# EAGLE board F21_CurrPDM v54 (EAGLE 9.7.0)
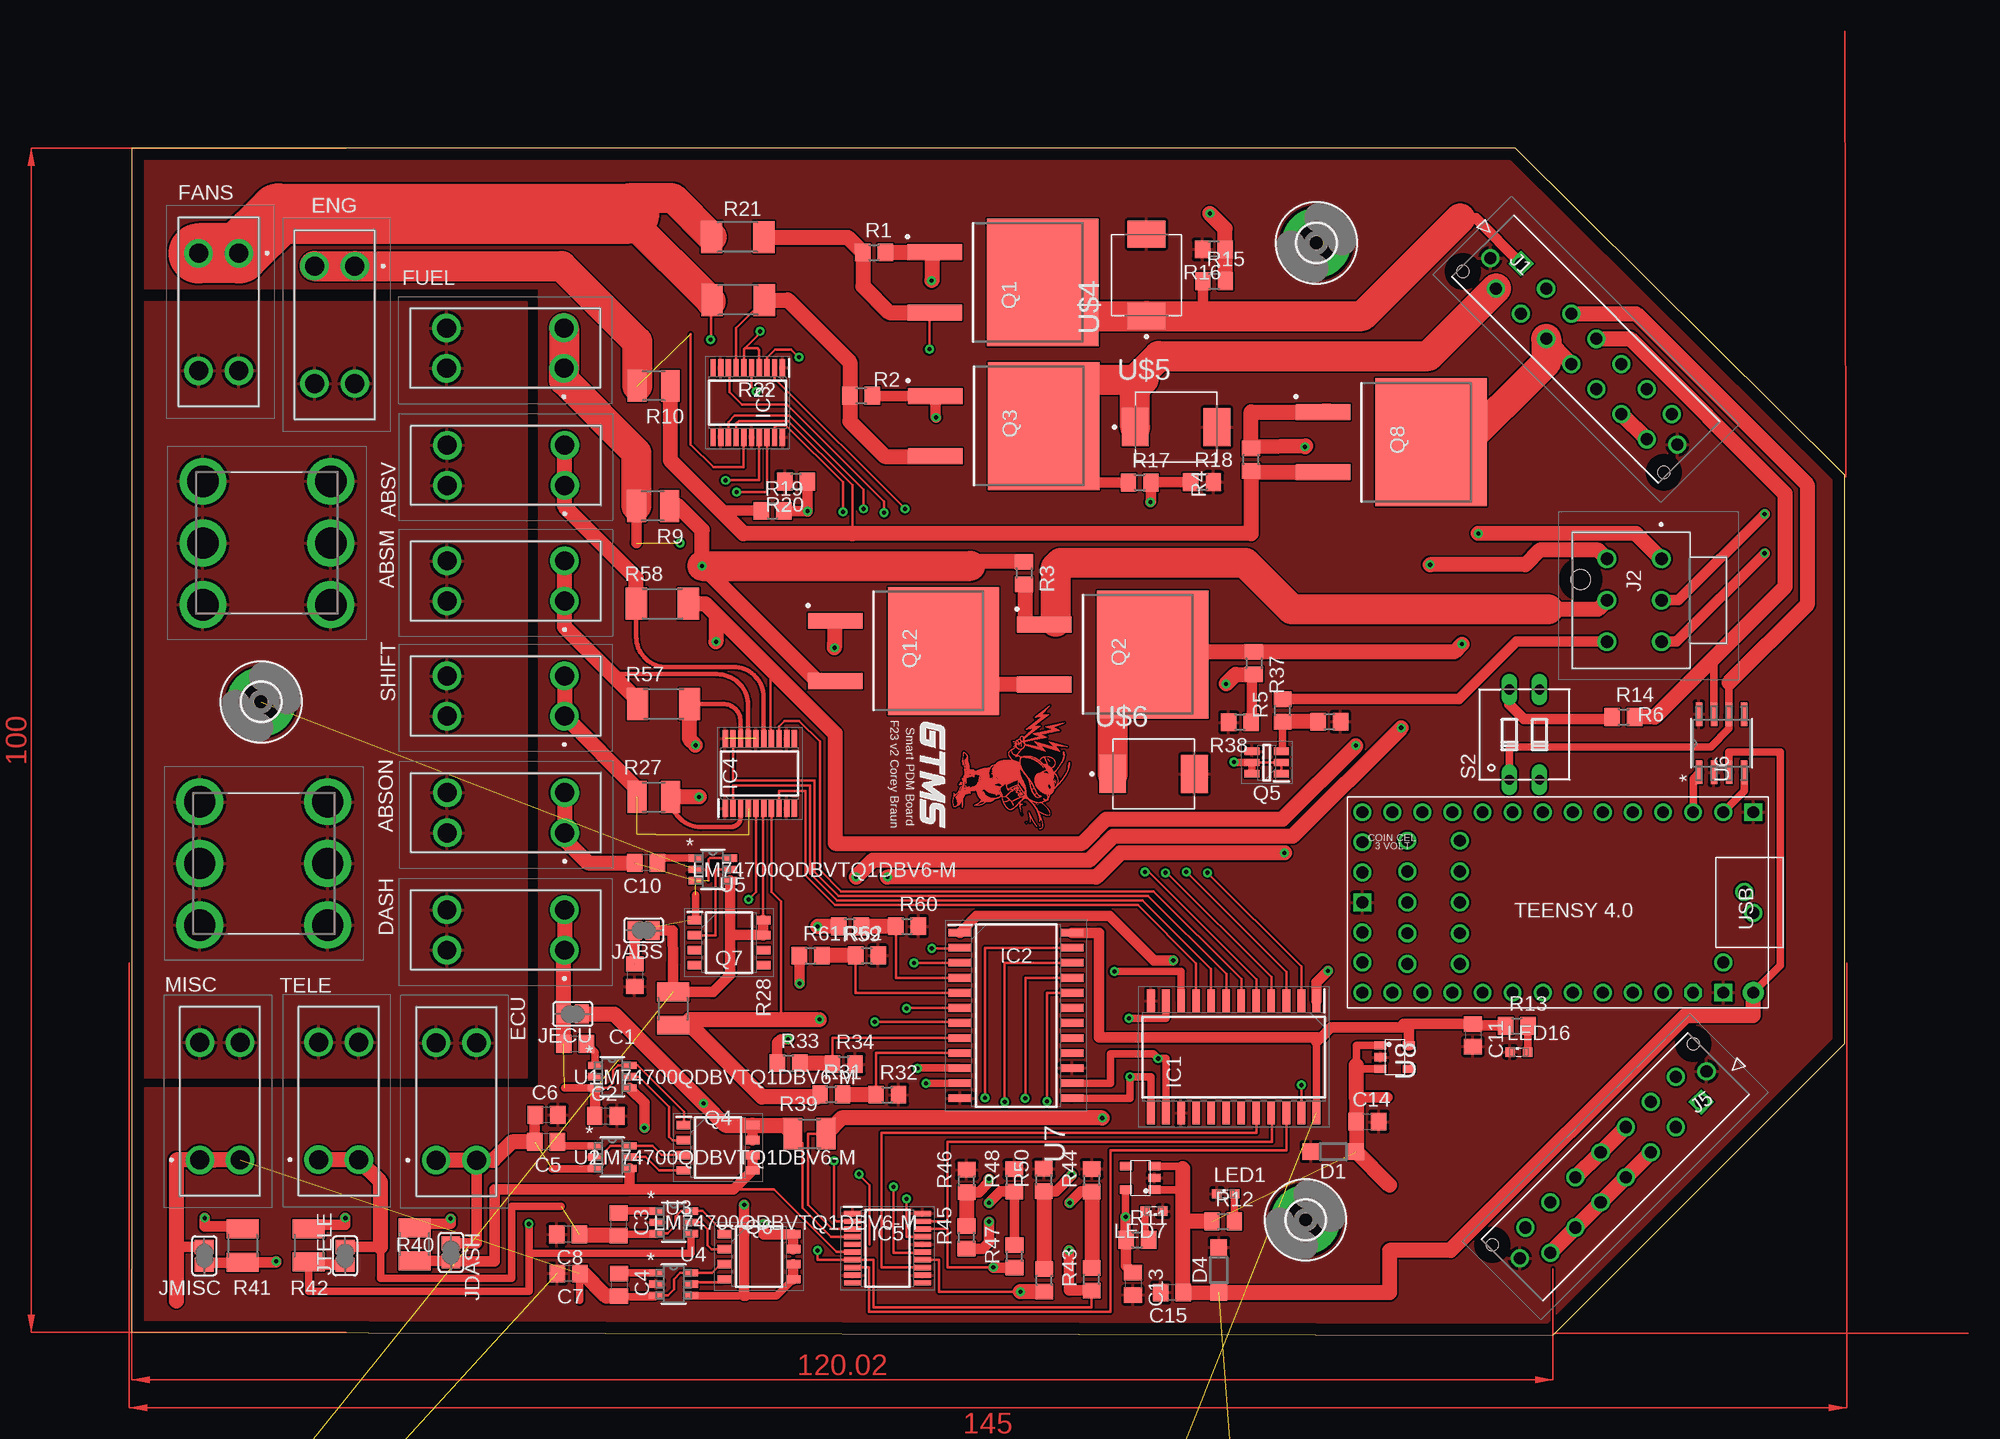
[diagram p0: board, top side]
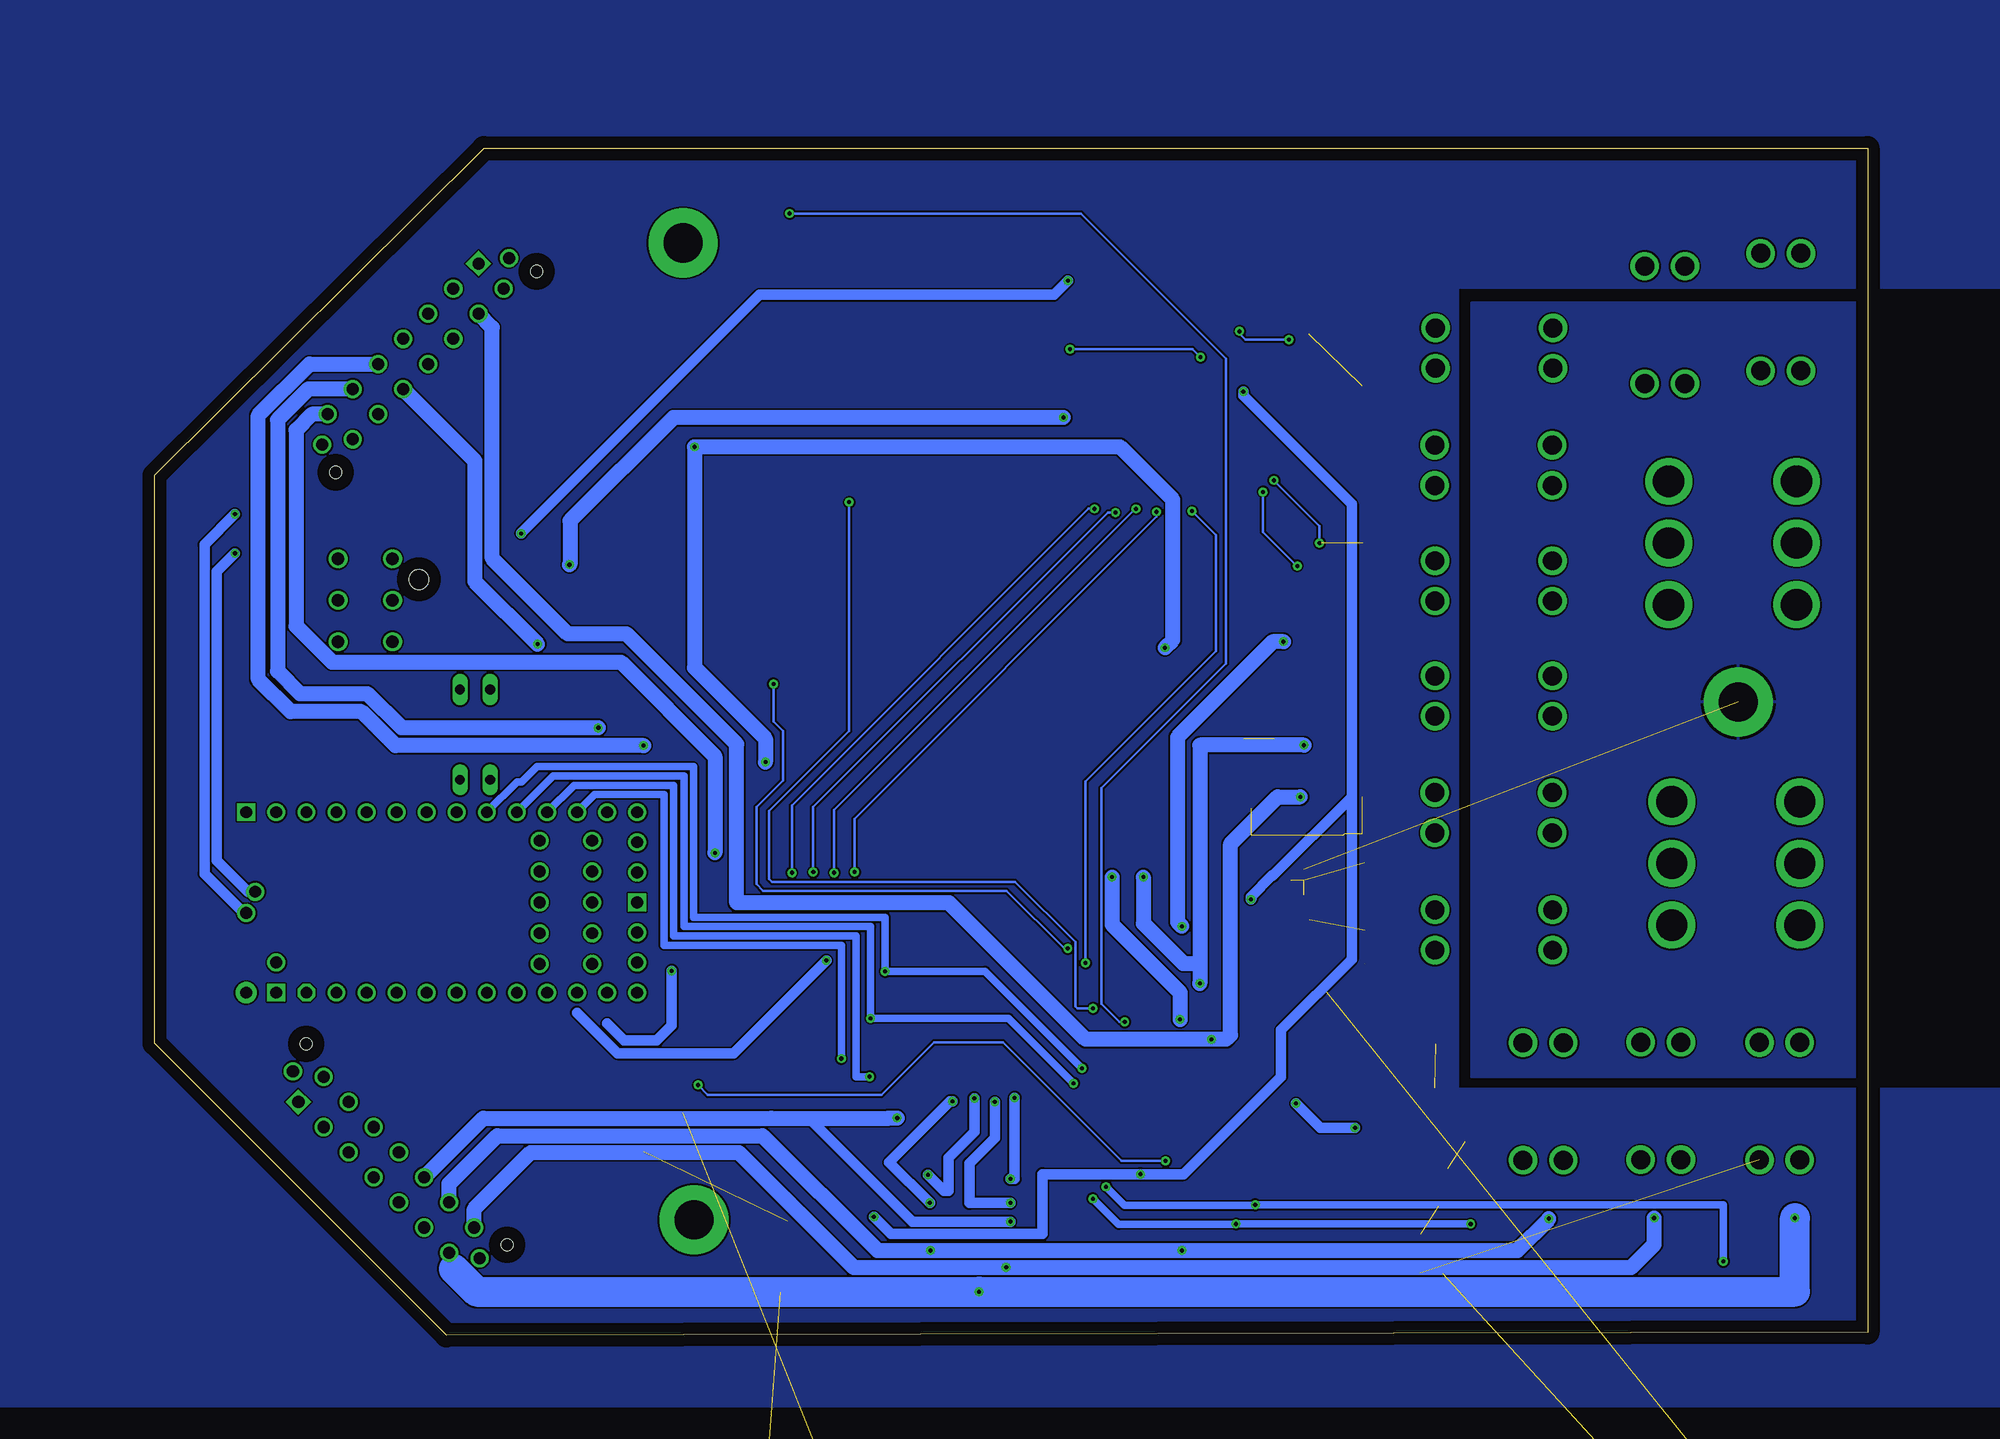
[diagram p1: board, bottom side, seen from below]

Size 144.65 x 100.25 mm. Coordinates in mm from the lower left corner, seen from the top.
Outline: 0,0.25 120.02,0 144.65,24.64 144.65,72.64 116.84,100.25 0,100.25 0,0.25
Copper layers (1*16): Top 0.035mm / dielectric 1.5mm / Bottom 0.035mm
Design rules "default *": minimum track width 6mil, minimum drill 0.35mm, track to track 6mil, track to pad 6mil, pad to pad 6mil, via to via 6mil, smd to smd 6mil, copper to edge 40mil, drill to drill 6mil, minimum pad ring 10mil, minimum via ring 8mil, stop-mask expansion 4mil, vias tented up to drill 0mil, thermal gap 10mil

## Footprints (pad centres in the part's own frame; a part is rotated, then mirrored left to right if it is on the bottom)
3568 = drill 1.6 pad 2.4: 1 0,0; 2 0,-3.4; 3 9.92,0; 4 9.92,-3.4
C0805 = smd 1.3 x 1.5: 1 -0.95,0; 2 0.95,0
CAPMP7343X310N = smd 2.368 x 2.404: 1 -3.121,0; 2 3.121,0
SOD123 = smd 1.4 x 1.4: A 1.9,0; C -1.9,0
DIOM5436X247N = smd 2.25 x 2.12: A 2.185,0; C -2.185,0
3,3-PAD = drill 3.3 pad 5.842: B3,3 0,0
SOIC127P1030X265-24N = smd 1.95 x 0.65: 1 -4.725,6.985; 2 -4.725,5.715; 3 -4.725,4.445; 4 -4.725,3.175; 5 -4.725,1.905; 6 -4.725,0.635; 7 -4.725,-0.635; 8 -4.725,-1.905; 9 -4.725,-3.175; 10 -4.725,-4.445; 11 -4.725,-5.715; 12 -4.725,-6.985; 13 4.725,-6.985; 14 4.725,-5.715; 15 4.725,-4.445; 16 4.725,-3.175; 17 4.725,-1.905; 18 4.725,-0.635; 19 4.725,0.635; 20 4.725,1.905; 21 4.725,3.175; 22 4.725,4.445; 23 4.725,5.715; 24 4.725,6.985
SOP65P640X120-20N = smd 1.475 x 0.45: 1 -2.938,2.925; 2 -2.938,2.275; 3 -2.938,1.625; 4 -2.938,0.975; 5 -2.938,0.325; 6 -2.938,-0.325; 7 -2.938,-0.975; 8 -2.938,-1.625; 9 -2.938,-2.275; 10 -2.938,-2.925; 11 2.938,-2.925; 12 2.938,-2.275; 13 2.938,-1.625; 14 2.938,-0.975; 15 2.938,-0.325; 16 2.938,0.325; 17 2.938,0.975; 18 2.938,1.625; 19 2.938,2.275; 20 2.938,2.925
43045-14YY_24,25,26 = drill 1.02 pad 1.37 square: 1 0,0 | drill 1.02 pad 1.37: 2 -3,0; 3 -6,0; 4 -9,0; 5 -12,0; 6 -15,0; 7 -18,0; 8 0,3; 9 -3,3; 10 -6,3; 11 -9,3; 12 -12,3; 13 -15,3; 14 -18,3 | drill 1.016 pad 1.37: 15 2.15,1.5; 16 -20.15,1.5 | hole 1.02: 3,3.94; -21,3.94
1722981106 = drill 1.06 pad 1.59: 1 -3.125,1.085; 2 0.375,1.085; 3 3.875,1.085; 4 -3.125,-3.515; 5 0.375,-3.515; 6 3.875,-3.515 | hole 1.64: -1.375,-5.745
8196 = drill 2.64 pad 3.96: 1 0,0; 2 0,10.8; 3 5.21,0; 4 5.21,10.8; 5 10.42,0; 6 10.42,10.8
8195 = drill 1.7 pad 2.55: 1 0,0; 2 0,-7.01; 3 4.75,-7.01; 4 4.75,0
SJ = smd 1.168 x 1.6: 1 -0.762,0; 2 0.762,0
IND_BOURNS_RLB0914 = drill 0.914 pad 1.422 square: 1 -5.791,0 | drill 0.914 pad 1.422: 2 0,0
SML0603 = smd 0.8 x 0.8: A 0.75,0; C -0.75,0
PG-TO263-3-2_1 = smd 1.35 x 4.6: 1 -2.54,-12.5; 2 2.54,-12.5 | smd 10.8 x 9.4: 3 0,-3.35
SOIC127P605X105-8N = smd 1.212 x 0.7: 1 -2.894,1.905; 2 -2.894,0.635; 3 -2.894,-0.635; 4 -2.894,-1.905; 5 2.894,-1.905; 6 2.894,-0.635; 7 2.894,0.635; 8 2.894,1.905
SOT95P275X110-6N = smd 1.25 x 0.6: 1 -1.25,0.95; 2 -1.25,0; 3 -1.25,-0.95; 4 1.25,-0.95; 5 1.25,0; 6 1.25,0.95
R0805 = smd 1.3 x 1.5: 1 -0.95,0; 2 0.95,0
R1210 = smd 1.6 x 2.7: 1 -1.4,0; 2 1.4,0
R2010 = smd 1.8 x 2.7: 1 -2.2,0; 2 2.2,0
DIP02YL = drill 0.813 long: 1 -1.27,-3.81; 2 1.27,-3.81; 3 1.27,3.81; 4 -1.27,3.81
DBV6-M = smd 1.181 x 0.61: 1 -1.467,0.95; 2 -1.467,0; 3 -1.467,-0.95; 4 1.467,-0.95; 5 1.467,0; 6 1.467,0.95
SOIC8 = smd 1.981 x 0.559: 1 -2.464,1.905; 2 -2.464,0.635; 3 -2.464,-0.635; 4 -2.464,-1.905; 5 2.464,-1.905; 6 2.464,-0.635; 7 2.464,0.635; 8 2.464,1.905
TSOP-5 = smd 0.7 x 1: 1 -0.99,-1.2; 2 0,-1.2; 3 0.99,-1.2; 4 0.99,1.2; 5 -0.99,1.2
SOT23-6 = smd 1.06 x 0.65: 1 -1.1,0.95; 2 -1.1,0; 3 -1.1,-0.95; 4 1.1,-0.95; 5 1.1,0; 6 1.1,0.95
TEENSY40 = drill 1: 0-RX1 -13.97,-7.62; 1-TX1 -11.43,-7.62; 2-OUT2 -8.89,-7.62; 3-LRCLK2 -6.35,-7.62; 3V3-2 16.51,-2.54; 4-BCLK2 -3.81,-7.62; 5-IN2 -1.27,-7.62; 6-OUT1D 1.27,-7.62; 7-RX2/OUT1A 3.81,-7.62; 8-TX2/IN1 6.35,-7.62; 9-OUT1C 8.89,-7.62; 10-CS/MQSR 11.43,-7.62; 11-MOSI/CTX1 13.97,-7.62; 12-MIO/MQSL 16.51,-7.62; 13-SCK/CRX1/LED 16.51,7.62; 14-A0/TX3/S-PFI_OUT 13.97,7.62; 15-A1/RX3/S-PDIF_IN 11.43,7.62; 16-A2/RX4/SCL1 8.89,7.62; 17-A3/TX4/SDA1 6.35,7.62; 18-A4/SDA0 3.81,7.62; 19-A5/SCL0 1.27,7.62; 20-A6/TX5/LRCLK1 -1.27,7.62; 21-A7/RX5/BCLK1 -3.81,7.62; 22-A8/CTX1 -6.35,7.62; 23-A9/CRX1/CCLK1 -8.89,7.62; 24-A10/TX6/SCL2 12.7,5.207; 25-A11/SDA2 8.255,5.207; 26-A12/MOSI1 12.7,2.603; 27-A13/SCK1 8.255,2.603; 28-RX7 12.7,0; 29-TX7 8.255,0; 30-CRX3 12.7,-2.603; 31-CTX3 8.255,-2.603; 32-OUTB1 12.7,-5.207; 33-MCLK2 8.255,-5.207; D+ -15.75,-0.9; D- -16.51,0.9; ON/OFF 16.51,5.08; PROGRAM 16.51,2.54; VBAT 16.51,-5.08; VUSB -13.97,5.08 | drill 1 octagon: 3V3-1 -11.43,7.62 | drill 1 square: GND1 -16.51,-7.62; GND2 16.51,0; GND3 -13.97,7.62 | drill 1 pad 1.778: VIN -16.51,7.62
DIOM7959X265N = smd 2.25 x 3.18: A 3.455,0; C -3.455,0

## Placement (x,y rotation side)
ABSM  3568  [3568]  36.54,62.01 180 top
ABSON  3568  [3568]  36.56,42.43 180 top
ABSV  3568  [3568]  36.55,71.78 180 top
C1  1u  [C0805]  37.43,24.6 180 top
C2  10u 25V  [C0805]  40.02,18.54 0 top
C3  1u  [C0805]  41.09,9.38 270 top
C4  1u  [C0805]  41.15,4.26 270 top
C5  1u  [C0805]  34.98,16.34 180 top
C6  10u 25V  [C0805]  35.04,18.63 0 top
C7  10u 25V  [C0805]  36.88,5.22 180 top
C8  10u 25V  [C0805]  36.83,8.53 180 top
C9  .1uF 12V  [C0805]  42.47,30.41 270 top
C10  1u  [C0805]  43.43,39.9 180 top
C11  [C0805]  113.25,25.34 270 top
C13  [C0805]  84.54,4.35 270 top
C14  [C0805]  104.34,18.04 0 top
C15  [C0805]  87.83,3.61 180 top
C18  [CAPMP7343X310N]  84.28,-28.6 0 top  (outside the outline)
C19  .1uF  [C0805]  -27.69,-63.35 0 top  (outside the outline)
C20  [C0805]  -22.56,-88.14 0 top  (outside the outline)
C21  [C0805]  -18.03,-88.14 0 top  (outside the outline)
C22  [C0805]  -27.69,-92.25 0 top  (outside the outline)
D1  [SOD123]  101.45,15.51 180 top
D3  MURS110T3G  [DIOM5436X247N]  -25.3,-80.72 0 top  (outside the outline)
D4  [SOD123]  91.78,5.52 90 top
DASH  3568  [3568]  25.7,14.78 90 top
ECU  3568  [3568]  36.53,32.53 180 top
ENG  3568  [3568]  18.83,90.29 270 top
FANS  3568  [3568]  9.03,91.38 270 top
FUEL  3568  [3568]  36.49,81.66 180 top
H1  MOUNT-PAD-ROUND3.3  [3,3-PAD]  100.03,92.25 0 top
H2  MOUNT-PAD-ROUND3.3  [3,3-PAD]  99.11,9.75 0 top
H3  MOUNT-PAD-ROUND3.3  [3,3-PAD]  10.92,53.49 0 top
IC1  CD74HC4067M96  [SOIC127P1030X265-24N]  93.05,23.51 270 top
IC2  CD74HC4067M96  [SOIC127P1030X265-24N]  74.67,27.01 0 top
IC3  INA4181A2IPWR  [SOP65P640X120-20N]  52,78.78 270 top
IC4  INA4181A2IPWR  [SOP65P640X120-20N]  53.03,47.44 90 top
IC5  INA4181A2IPWR  [SOP65P640X120-20N]  63.81,7.36 0 top
J1  43045-1424  [43045-14YY_24,25,26]  117.31,90.52 135 top
J2  1722981106  [1722981106]  128.07,62.45 270 top
J3  8196  [8196]  16.54,34.64 90 top
J4  8196  [8196]  16.81,61.7 90 top
J5  43045-1424  [43045-14YY_24,25,26]  132.51,19.71 45 top
J6  [8195]  94.03,-26.42 0 top  (outside the outline)
JABS  [SJ]  43.22,34.2 180 top
JDASH  [SJ]  26.94,7 270 top
JECU  [SJ]  37.23,27.13 180 top
JMISC  [SJ]  6.12,6.72 270 top
JTELE  [SJ]  18.01,6.71 90 top
L1  RLB0914-4R7ML  [IND_BOURNS_RLB0914]  -20.52,-71.37 0 top  (outside the outline)
LED1  [SML0603]  92.36,11.95 0 top
LED7  [SML0603]  86.32,10.48 180 top
LED16  [SML0603]  117.12,23.93 0 top
MISC  3568  [3568]  5.75,14.81 90 top
Q1  IPB120P04P4L03ATMA1  [PG-TO263-3-2_1]  80.28,88.92 270 top
Q2  IPB120P04P4L03ATMA1  [PG-TO263-3-2_1]  89.55,57.51 270 top
Q3  IPB120P04P4L03ATMA1  [PG-TO263-3-2_1]  80.35,76.79 270 top
Q4  BUK9K29-100E  [SOIC127P605X105-8N]  49.51,15.85 0 top
Q5  NSVT489AMT1G  [SOT95P275X110-6N]  95.83,48.37 180 top
Q6  BUK9K29-100E  [SOIC127P605X105-8N]  52.96,6.64 0 top
Q7  BUK9K29-100E  [SOIC127P605X105-8N]  50.43,33.15 0 top
Q8  IPB120P04P4L03ATMA1  [PG-TO263-3-2_1]  113.08,75.43 270 top
Q12  IPB120P04P4L03ATMA1  [PG-TO263-3-2_1]  71.89,57.8 270 top
R1  1k  [R0805]  62.68,91.44 0 top
R2  1k  [R0805]  61.59,79.35 0 top
R3  1k  [R0805]  75.34,64.38 270 top
R4  1k  [R0805]  94.51,73.95 90 top
R5  20k  [R0805]  97.18,52.77 90 top
R6  1k  [R0805]  101.11,51.82 0 top
R9  0.02  [R1210]  44.02,70.04 180 top
R10  0.02  [R1210]  44.07,80.18 180 top
R11  330  [R0805]  84.9,8.07 0 top
R12  330  [R0805]  92.15,9.62 0 top
R13  330  [R0805]  116.95,26.14 0 top
R14  [R0805]  125.96,52.22 0 top
R15  36k  [R0805]  91.4,89.02 0 top
R16  10k  [R0805]  91.36,91.71 180 top
R17  36k  [R0805]  85.11,72.02 0 top
R18  10k  [R0805]  90.38,72.06 0 top
R19  36k  [R0805]  54.09,69.63 0 top
R20  10k  [R0805]  56.09,72.09 180 top
R21  0.005  [R2010]  51.16,92.75 180 top
R22  0.005  [R2010]  51.2,87.43 180 top
R23  [R0805]  -14.88,-79.45 0 top  (outside the outline)
R24  [R0805]  -27.69,-88.14 0 top  (outside the outline)
R27  0.02  [R1210]  44.08,45.45 0 top
R28  0.02  [R1210]  45.69,27.59 270 top
R31  36k  [R0805]  59.07,20.35 0 top
R32  10k  [R0805]  63.8,20.32 0 top
R33  36k  [R0805]  55.45,22.99 0 top
R34  10k  [R0805]  60.12,22.9 0 top
R37  36k  [R0805]  94.75,56.76 270 top
R38  10k  [R0805]  93.57,51.77 180 top
R39  0.02  [R1210]  57.22,17.04 0 top
R40  0.02  [R1210]  23.87,7.68 90 top
R41  0.02  [R1210]  9.36,7.58 270 top
R42  0.02  [R1210]  14.95,7.59 270 top
R43  36k  [R0805]  81.05,4.73 90 top
R44  10k  [R0805]  81.06,13.09 90 top
R45  36k  [R0805]  70.49,8.27 90 top
R46  10k  [R0805]  70.49,13.04 90 top
R47  36k  [R0805]  74.54,6.66 90 top
R48  10k  [R0805]  74.52,13.09 90 top
R49  36k  [R0805]  77.04,4.65 90 top
R50  10k  [R0805]  77.01,13.13 90 top
R57  0.005  [R2010]  44.9,53.32 0 top
R58  0.005  [R2010]  44.8,61.8 0 top
R59  36k  [R0805]  60.63,34.53 0 top
R60  10k  [R0805]  65.46,34.55 0 top
R61  36k  [R0805]  57.32,32.06 0 top
R62  10k  [R0805]  62.07,32.08 0 top
S2  [DIP02YL]  117.59,50.73 0 top
SHIFT  3568  [3568]  36.53,52.3 180 top
TELE  3568  [3568]  15.76,14.83 90 top
U1  LM74700QDBVTQ1DBV6-M  [DBV6-M]  40.57,21.84 0 top
U2  LM74700QDBVTQ1DBV6-M  [DBV6-M]  40.57,15.06 0 top
U3  LM74700QDBVTQ1DBV6-M  [DBV6-M]  45.77,9.55 0 top
U4  LM74700QDBVTQ1DBV6-M  [DBV6-M]  45.75,4.33 0 top
U5  LM74700QDBVTQ1DBV6-M  [DBV6-M]  49.06,39.35 0 top
U6  NCV7349D10R2G  [SOIC8]  134.24,50 90 top
U7  NCP114AMX330T1GTSOP-5  [TSOP-5]  85.15,13.29 90 top
U8  NCP114AMX330T1GTSOP-5  [TSOP-5]  106.64,23.49 270 top
U9  AP3211KTR-G1  [SOT23-6]  -21.39,-91.03 0 top  (outside the outline)
U$1  TEENSY40  [TEENSY40]  120.41,36.56 180 top
U$2  ECE_BUZZ  [ECE_BUZZ]  73.86,47.45 270 top
U$3  GTMS  [GTMS]  67.41,47.8 270 top
U$4  S10AL-TP  [DIOM7959X265N]  85.68,89.53 90 top
U$5  S10AL-TP  [DIOM7959X265N]  88.18,76.7 0 top
U$6  S10AL-TP  [DIOM7959X265N]  86.28,47.4 0 top

## Library data of the parts
ABSM ABSON ABSV DASH ECU ENG FANS FUEL MISC SHIFT TELE = SamacSys_Parts; DESCRIPTION: Fuse Holder .63 MINI FUSE HOLDER; HEIGHT: 7.37mm; MANUFACTURER_NAME: Keystone Electronics; MANUFACTURER_PART_NUMBER: 3568; MOUSER_PART_NUMBER: 534-3568; MOUSER_PRICE-STOCK: https://www.mouser.com/Search/Refine.aspx?Keyword=534-3568
C1-C10 C19 = rcl; SPICEPREFIX: C
C11 C13 = rcl; SPICEPREFIX: 1u
C14 C15 C22 = rcl; SPICEPREFIX: 10u 25v
C18 = Capacitor; CATEGORY: Capacitor
C20 = rcl; SPICEPREFIX: 10n
C21 = rcl; SPICEPREFIX: 22u
D1 D4 = Diode
D3 = MURS110T3G
H1-H3 = holes
IC1 IC2 = SamacSys_Parts; DESCRIPTION: High Speed CMOS 16-Channel Analog Multiplexer/Demultiplexer; HEIGHT: 2.65mm; MANUFACTURER_NAME: Texas Instruments; MANUFACTURER_PART_NUMBER: CD74HC4067M96; MOUSER_PART_NUMBER: 595-CD74HC4067M96; MOUSER_PRICE-STOCK: https://www.mouser.co.uk/ProductDetail/Texas-Instruments/CD74HC4067M96?qs=xFfolx0DHx0XT7d9xTTZBA%3D%3D
IC3-IC5 = SamacSys_Parts; DESCRIPTION: Current Sense Amplifiers Quad 26V, Bidirectional, Low- or High-Side Voltage Output Current Sense Amplifier 20-TSSOP -40 to 125; HEIGHT: 1.2mm; MANUFACTURER_NAME: Texas Instruments; MANUFACTURER_PART_NUMBER: INA4181A2IPWR; MOUSER_PART_NUMBER: 595-INA4181A2IPWR; MOUSER_PRICE-STOCK: https://www.mouser.co.uk/ProductDetail/Texas-Instruments/INA4181A2IPWR?qs=chTDxNqvsymooUCfoOrGuA%3D%3D
J1 J5 = 43045-1424_adj; DESCRIPTION: Molex MICRO-FIT 3.0 Series, Series Number 43045, 3mm Pitch 14 Way 2 Row Straight PCB Header, Solder Termination, 5A; HEIGHT: 8.87mm; MANUFACTURER_NAME: Molex; MANUFACTURER_PART_NUMBER: 43045-1424; MOUSER_PART_NUMBER: 538-43045-1424; MOUSER_PRICE-STOCK: https://www.mouser.co.uk/ProductDetail/Molex/43045-1424?qs=j9UNeyIG7EIyPG%2F%2F%2FQgkdw%3D%3D
J2 = Molex_1722981106; DESCRIPTION: ULTRAFIT CONN HDR 06CKT; HEIGHT: 14mm; MANUFACTURER_NAME: Molex; MANUFACTURER_PART_NUMBER: 1722981106
J3 J4 = 8196_ScrewTerminal; DESCRIPTION: Terminal; 10-32; Stainless Steel; 3/8 in.; 0.679 in.; 0.679 in.; Brass; Tin; HEIGHT: 11.51mm; MANUFACTURER_NAME: Keystone Electronics; MANUFACTURER_PART_NUMBER: 8196; MOUSER_PART_NUMBER: 534-8196; MOUSER_PRICE-STOCK: https://www.mouser.com/Search/Refine.aspx?Keyword=534-8196
J6 = Library; DESCRIPTION: KEYSTONE - 8195 - PCB Terminal, Brass, 1.57 mm, Tin; HEIGHT: 3.4mm; MANUFACTURER_NAME: Keystone Electronics; MANUFACTURER_PART_NUMBER: 8195; MOUSER_PART_NUMBER: 534-8195; MOUSER_PRICE-STOCK: https://www.mouser.co.uk/ProductDetail/Keystone-Electronics/8195?qs=lQmX4aIt5iAmqGibOjFdHw%3D%3D
JABS JDASH JECU JMISC JTELE = jumper
L1 = AP3211; MANUFACTURER_PART_NUMBER: RLB09144R7ML; VENDOR: Bourns Electronics
LED1 LED7 LED16 = LED
Q1-Q3 Q8 Q12 = IPB120P04P4L03ATMA1; DESCRIPTION: IPB120P04P4L03ATMA1 P-Channel MOSFET, 120 A, 40 V OptiMOS P, 3-Pin D2PAK Infineon; HEIGHT: mm; MANUFACTURER_NAME: Infineon; MANUFACTURER_PART_NUMBER: IPB120P04P4L03ATMA1; MOUSER_PART_NUMBER: 726-IPB120P04P4L03AT; MOUSER_PRICE-STOCK: https://www.mouser.com/Search/Refine.aspx?Keyword=726-IPB120P04P4L03AT
Q4 Q6 Q7 = BUK9K29-100E; DESCRIPTION: NPN/PNP high power double bipolar transistor in a SOT1205 (LFPAK56D) Surface Mounted Device (SMD) power plastic package; HEIGHT: 1.05mm; MANUFACTURER_NAME: Nexperia; MANUFACTURER_PART_NUMBER: PHPT610030NPKX; MOUSER2_PART_NUMBER: 771-PHPT610030NPKX; MOUSER2_PRICE-STOCK: https://www.mouser.com/Search/Refine.aspx?Keyword=771-PHPT610030NPKX
Q5 = NSVT489AMT1G; DESCRIPTION: NPN Bipolar Transistor, 2 A 30 V, 6-pin TSOP; HEIGHT: 1.1mm; MANUFACTURER_NAME: ON Semiconductor; MANUFACTURER_PART_NUMBER: NSVT489AMT1G; MOUSER_PART_NUMBER: 863-NSVT489AMT1G; MOUSER_PRICE-STOCK: https://www.mouser.com/Search/Refine.aspx?Keyword=863-NSVT489AMT1G
R1-R6 R9-R13 R15-R22 R27 R28 R31-R34 R37-R50 R57-R62 = rcl; SPICEPREFIX: R
R14 = rcl; SPICEPREFIX: 120
R23 = rcl; SPICEPREFIX: 49.9k
R24 = rcl; SPICEPREFIX: 10k
S2 = switch-dil; OC_FARNELL: unknown; OC_NEWARK: unknown
U1-U5 = LM74700; COPYRIGHT: Copyright (C) 2016 Accelerated Designs. All rights reserved; MANUFACTURER_PART_NUMBER: LM74700QDBVTQ1; VENDOR: Texas Instruments
U6 = NCV7349D10R2G; MANUFACTURER_PART_NUMBER: NCV7349D10R2G; VENDOR: ON Semiconductor
U7 U8 = NCP114AMX330TCG
U9 = AP3211; MANUFACTURER_PART_NUMBER: AP3211KTRG1; VENDOR: Diodes Inc
U$1 = teensy
U$2 U$3 = art
U$4-U$6 = S10AL-TP

## Nets
+3V3_A1: C13.1 IC3.5 IC4.5 R11.1 U7.5
+3V3_A2: C11.1 C18.1 IC1.24 IC2.24 R13.1 U8.5
+5V: C14.1 C15.1 C21.1 D1.C D4.C J6.1 J6.2 J6.3 J6.4 L1.1 R12.1 R23.2 U6.3 U7.1 U7.3 U8.1 U8.3 U$1.VIN
+12V: ABSM.3 ABSM.4 ABSON.3 ABSON.4 ABSV.3 ABSV.4 DASH.3 DASH.4 ECU.3 ECU.4 ENG.3 ENG.4 FANS.3 FANS.4 FUEL.3 FUEL.4 J3.1 J3.2 J3.3 J3.4 J3.5 J3.6 J4.1 J4.2 J4.3 J4.4 J4.5 J4.6 MISC.3 MISC.4 SHIFT.3 SHIFT.4 TELE.3 TELE.4
ABSMOTOR_F: ABSM.1 ABSM.2 IC4.17 R57.1
ABSMOTOR_I: IC1.7 IC4.19
ABSMOTOR_OUT: IC4.18 J1.6 R57.2 R61.1
ABSON+: C19.1 IC4.6 JABS.1 Q7.7 Q7.8 R28.1 U5.4
ABSON_I: IC1.9 IC4.8
ABSON_OUT: IC4.7 J1.7 R28.2 R31.1
ABSVALVE_F: ABSV.1 ABSV.2 IC4.15 R58.1
ABSVALVE_I: IC1.6 IC4.13
ABSVALVE_OUT: IC4.14 J1.5 R58.2 R59.1
CAN_H: J1.4 R14.2 U6.7
CAN_L: J1.3 S2.1 U6.6
CAN_RX: U6.4 U$1.0-RX1
CAN_TX: U6.1 U$1.1-TX1
DASH+: IC5.6 JDASH.2 Q4.5 Q4.6 R40.1 U2.4
DASH_I: IC1.22 IC5.8
DASH_OUT: IC5.7 J5.13 R40.2 R43.1
ECU+: IC5.4 JECU.1 Q4.7 Q4.8 R39.1 U1.4
ECU_I: IC1.23 IC5.2
ECU_OUT: IC5.3 J5.10 J5.11 J5.12 R39.2 R45.1
ENGINE+: IC3.14 Q8.2 R4.1 R10.1 R19.1
ENGINE_F: ENG.1 ENG.2 IC3.15 R10.2
ENGINE_I: IC1.4 IC3.13
ENGINE_OUT: J1.13 J1.14
ESTOP_IN: J2.6 R5.2
FAN1+: IC3.3 Q1.2 R1.1 R21.1
FAN1_I: IC1.2 IC3.2
FAN1_OUT: J1.1 Q1.3 R15.1 U$4.C
FAN1SIG: J2.1 Q1.1 R1.2
FAN2+: IC3.7 Q3.2 R2.1 R22.1
FAN2_I: IC1.3 IC3.8
FAN2_OUT: J1.8 Q3.3 R17.1 U$5.C
FAN2SIG: J2.4 Q3.1 R2.2
FANS_F: FANS.1 FANS.2 IC3.4 IC3.6 R21.2 R22.2
FUEL+: IC3.18 Q12.2 R3.1 R9.1
FUEL_F: FUEL.1 FUEL.2 IC3.17 R9.2
FUEL_I: IC1.5 IC3.19
FUEL_OUT: J1.12 Q2.3 R37.1 U$6.C
FUELSIG: J2.5 Q2.1 R3.2
GND: C2.2 C6.2 C7.2 C8.2 C9.2 C11.2 C13.2 C14.2 C15.2 C19.2 C21.2 C22.2 D1.A D3.A D4.A H1.B3,3 H2.B3,3 H3.B3,3 IC1.12 IC1.15 IC2.12 IC2.15 IC3.1 IC3.9 IC3.12 IC3.16 IC3.20 IC4.1 IC4.9 IC4.12 IC4.16 IC4.20 IC5.1 IC5.9 IC5.12 IC5.16 IC5.20 J1.15 J1.16 J5.15 J5.16 LED1.C LED7.C LED16.C Q5.4 R6.2 R16.2 R18.2 R20.2 R24.1 R32.2 R34.2 R38.2 R44.2 R46.2 R48.2 R50.2 R60.2 R62.2 U1.2 U2.2 U3.2 U4.2 U5.2 U6.2 U6.8 U7.2 U8.2 U9.2 U$1.GND1 U$1.GND2 U$1.GND3 U$4.A U$5.A U$6.A
I_SENSE: IC1.1
INJIGN_OUT: J1.10 J1.11 Q8.3
MICS_OUT: IC5.14 J5.3 J5.4 J5.5 J5.6 J5.7 R41.1 R49.1
MISC+: IC5.15 JMISC.2 Q6.5 Q6.6 R41.2 U4.4
MISC_I: IC1.20 IC5.13
N$1: C1.2 C2.1 ECU.1 ECU.2 JECU.2 Q4.1 U1.3 U1.6
N$2: C20.1 U9.1
N$3: Q2.2 Q12.3
N$4: LED16.A R13.2
N$5: Q5.3 R5.1 R6.1
N$6: C1.1 U1.1
N$7: Q5.1 Q5.2 Q5.5 Q5.6 Q8.1 Q12.1 R4.2
N$8: C5.1 U2.1
N$9: C20.2 D3.C L1.2 U9.6
N$11: R23.1 R24.2 U9.3
N$12: Q4.2 U1.5
N$13: C22.1 U9.4 U9.5
N$14: C10.1 U5.1
N$15: Q4.4 U2.5
N$16: C3.1 U3.1
N$19: C4.1 U4.1
N$20: Q7.2 U5.5
N$21: LED1.A R12.2
N$28: Q6.2 U3.5
N$30: Q6.4 U4.5
N$32: LED7.A R11.2
N$89: R14.1 S2.4
S_0: IC1.10 IC2.10 U$1.7-RX2/OUT1A
S_1: IC1.11 IC2.11 U$1.8-TX2/IN1
S_2: IC1.14 IC2.14 U$1.10-CS/MQSR
S_3: IC1.13 IC2.13 U$1.9-OUT1C
SHIFTER_F: IC4.4 R27.1 SHIFT.1 SHIFT.2
SHIFTER_F1: C5.2 C6.1 DASH.1 DASH.2 JDASH.1 Q4.3 U2.3 U2.6
SHIFTER_F2: C3.2 C8.1 JTELE.2 Q6.1 TELE.1 TELE.2 U3.3 U3.6
SHIFTER_F3: C4.2 C7.1 JMISC.1 MISC.1 MISC.2 Q6.3 U4.3 U4.6
SHIFTER_F4: ABSON.1 ABSON.2 C9.1 C10.2 JABS.2 Q7.1 U5.3 U5.6
SHIFTER_I: IC1.8 IC4.2
SHIFTER_OUT: IC4.3 J1.9 R27.2 R33.1
TELE+: IC5.17 JTELE.1 Q6.7 Q6.8 R42.2 U3.4
TELE_I: IC1.21 IC5.19
TELE_OUT: IC5.18 J5.14 R42.1 R47.1
USB+: J2.3 U$1.D+
USB-: J2.2 U$1.D-
V_ABSMOTOR: IC2.5 R61.2 R62.1
V_ABSON: IC2.9 R31.2 R32.1
V_ABSVALVE: IC2.4 R59.2 R60.1
V_DASH: IC2.20 R43.2 R44.1
V_ECU: IC2.23 R45.2 R46.1
V_ENGINE: IC2.3 R19.2 R20.1
V_FAN1: IC2.7 R15.2 R16.1
V_FAN2: IC2.6 R17.2 R18.1
V_FUEL: IC2.2 R37.2 R38.1
V_MISC: IC2.21 R49.2 R50.1
V_SENSE: IC2.1
V_SHIFTER: IC2.8 R33.2 R34.1
V_TELE: IC2.22 R47.2 R48.1

## Tracks (layer width: path | path; a pad name or v marks a point on that pad's centre or on a via)
+3V3_A1  (via drill 0.35)
  Top 0.229: v52.09,36.82 52.7,37.44 IC4.5 | IC3.5 52.33,80.11 v52.73,79.7 | 62.28,7.69 62.28,12.67 61.42,13.54 v61.42,13.61
  Top 0.635: U7.5 83.92,12.3 v83.92,10.01
  Top 0.889: v83.92,10.01 83.92,8.1 R11.1 83.95,5.89 C13.1
  Bottom 0.889: 43.57,45.46 43.57,70.19 52.73,79.35 v52.73,79.7 | 52.03,36.88 v52.09,36.82 52.09,37.03 50.29,38.82 50.2,38.82 43.57,45.46 | 43.57,45.46 43.57,31.76 49.54,25.78 49.54,21.83 57.76,13.61 v61.42,13.61 69.7,13.61 69.7,8.56 82.47,8.56 v83.92,10.01
+3V3_A2  (1 unrouted)
  Top 0.635: 100.04,24.77 100.04,18.79 IC1.24
  Top 0.889: R13.1 115.95,26.19 113.35,26.19 C11.1 107.39,26.29 107.7,25.99 | IC2.24 81.67,34 81.67,25.17 100.45,25.17 | 107.7,25.99 101.26,25.99 100.45,25.17 | 100.45,25.17 100.04,24.77 | 107.7,25.99 107.84,25.84 U8.5
+5V  (8 unrouted)
  Top 0.635: U$1.VIN 139.21,31.23 139.21,49.25 134.87,49.25 U6.3 | U8.3 103.7,22.5 103.39,22.81 103.39,24.48 U8.1 | U7.3 88.76,14.28 88.76,14.07 | U7.1 88.76,12.3 88.76,12.14
  Top 0.889: 106.03,20.12 103.39,20.12
  Top 1.27: U$1.VIN 136.92,27.01 136.89,27.04 131.21,27.04 111.36,7.18 106.21,7.18 106.21,3.61 D4.C | 106.21,12.68 103.35,15.54 D1.C 103.39,15.56 C14.1 103.39,20.12 103.39,22.81 | R12.1 88.76,9.62 | D4.C C15.1 88.76,3.63 88.76,9.62 | D4.C | 88.76,9.62 88.76,12.14 88.76,14.07 88.76,14.08
+12V
  pour Top: -15.16,21.77 33.37,21.77 33.37,87.25 -15.16,87.25
ABSMOTOR_F
  Top 0.229: IC4.17
  Top 0.381: IC4.17 52.05,53.19 arc90 49.41,55.83 40.53,55.83 arc-90 40.49,55.88
  Top 0.889: 42.64,53.38 R57.1
  Top 1.27: ABSM.2 ABSM.1 36.54,59.82 40.49,55.88 42.87,53.49 | 42.96,53.49 42.96,53.41 42.87,53.49 | R57.1 42.87,53.49
ABSMOTOR_I
  Top 0.229: IC4.19 50.75,46.86 57.66,46.86 57.66,39.15 59.69,37.12 85.81,37.12 92.41,30.52 IC1.7
ABSMOTOR_OUT  (via drill 0.35)
  Top 0.381: R57.2 49.93,53.32 arc-90 51.4,51.84 IC4.18
  Top 0.889: R61.1 56.39,32.05 v56.39,29.72
  Top 1.27: R57.2 47.1,50.33 v47.6,49.84 | v61.16,38.71 62.59,40.13 80.85,40.13 82.89,42.16 98.04,42.16 v107.19,51.31
  Bottom 1.27: v47.6,49.84 56.39,49.84 56.39,31.39 | 56.39,31.39 v56.39,29.72 | v107.19,51.31 107.2,51.32 123.81,51.32 126.7,54.2 132.39,54.2 134.28,56.09 134.28,77.32 131.68,79.91 J1.6 | v61.16,38.71 61.16,34.77 57.79,31.39 56.39,31.39
ABSON+  (1 unrouted)
  Top 0.229: IC4.6 53.31,44.46 53.31,35.07 Q7.8
  Top 0.889: JABS.1 45.68,34.2 45.69,31.39 R28.1 49.06,28.99 50.52,30.46 50.52,33.83 | U5.4 50.52,33.83 | Q7.8 Q7.7 53.28,33.83 50.52,33.83
ABSON_I
  Top 0.229: IC4.8 54.65,45.97 56.87,45.97 56.87,38.86 59.37,36.35 84.94,36.35 89.87,31.43 IC1.9
ABSON_OUT  (via drill 0.35)
  Top 0.229: 54.8,26.65 54.8,36.64 54,37.44 IC4.7
  Top 1.27: R31.1 57.89,20.12 53.21,20.12 47.09,26.25 | 47.09,26.25 45.74,26.25 R28.2 | v58.06,26.67 58.05,26.65 54.8,26.65 47.09,26.65 47.09,26.25 | 47.09,26.25 47.09,26.07 | v97.33,40.74 83.47,40.74 81.44,38.71 v63.8,38.71
  Bottom 1.27: v63.8,38.71 63.8,34.69 58.06,28.95 v58.06,26.67 | v97.33,40.74 97.33,48.9 105.28,56.84 114.77,56.84 114.77,56.85 129.68,56.85 132.71,59.88 132.71,76.46 131.38,77.79 J1.7
ABSVALVE_F
  Top 0.229: IC4.15 53.37,50.4
  Top 0.381: IC4.15 53.35,53.9 arc90 50.81,56.44 45.14,56.44 arc-90 42.6,58.98 R58.1
  Top 1.27: R58.1 42.6,63.96 36.55,70 ABSV.1 ABSV.2
ABSVALVE_I
  Top 0.229: IC1.6 93.68,30.09 86.27,37.5 59.9,37.5 58.1,39.3 58.1,50.14 56.34,51.89 55.12,51.89 54.65,51.43 IC4.13
ABSVALVE_OUT  (via drill 0.35)
  Top 0.229: 53.95,56.26 53.95,50.43 IC4.14
  Top 1.27: R59.1 57.93,34.53 v57.91,34.54 | v103.35,49.81 103.35,49.77 97.17,43.59 82.3,43.59 80.26,41.55 59.38,41.55 59.38,50.82 53.95,56.26 49.33,60.88 49.33,60.81 | R58.2 48.41,61.8 49.37,60.84 49.33,60.81 | 49.33,60.81 v49.33,58.57
  Bottom 1.27: v57.91,34.54 58.28,34.91 58.28,50.52 50.22,58.57 v49.33,58.57 | v103.35,49.81 103.37,49.79 124.3,49.79 127.18,52.67 133.18,52.67 135.91,55.4 135.91,77.7 131.57,82.03 J1.5
CAN_H
  Top 0.635: U6.7 133.6,57.23 133.92,57.55
  Top 1.27: R14.2 128.59,52.22 132.95,56.58 133.92,57.55 139.58,63.21 139.58,71.1 126.53,84.15 J1.4
CAN_L
  Top 0.635: S2.1 116.32,49.68 133.31,49.68 134.87,51.24 U6.6 134.87,55.12
  Top 1.27: J1.3 127.03,86.28 141.46,71.84 141.46,61.7 134.87,55.12
CAN_RX
  Top 0.635: U6.4 136.16,47.54 136.16,45.96 U$1.0-RX1
CAN_TX
  Top 0.635: U6.1 131.84,47.04 U$1.1-TX1
DASH+
  Top 0.229: IC5.6 59.51,7.04 54.21,12.33 50.8,12.33
  Top 0.889: Q4.6 Q4.5 50.8,12.33 41.96,12.33 | U2.4 42.04,12.41 41.96,12.33 | 23.91,6.24 R40.1 26.9,6.28 JDASH.2 30.63,6.24 30.63,12.33 41.96,12.33
DASH_I
  Top 0.229: IC5.8 62.26,5.73 62.26,1.98 82.65,1.98 82.65,15.62 97.49,15.62 IC1.22
DASH_OUT  (via drill 0.35)
  Top 0.229: 80.94,3.9 R43.1 81.05,2.36 62.64,2.36 62.64,6.38 IC5.7 57.91,6.38 v57.91,7.16
  Top 0.889: R40.2 24.19,9.4 26.92,9.4 v26.92,9.86 | R43.1 79.15,3.78 v79.15,7.16
  Bottom 1.27: v26.92,9.86 26.92,9.8 29.57,7.16 v57.91,7.16 v79.15,7.16 83.62,7.16 93.32,16.86 115.72,16.86 119.78,12.79 J5.13
ECU+  (via drill 0.35)
  Top 0.229: IC5.4 59.05,8.33 56.63,10.76 56.63,16.22 R39.1
  Top 0.889: Q4.8 Q4.7 | v43.28,17.53 v43.29,17.53 43.29,19.64 42.13,20.79 U1.4
  Top 1.27: JECU.1 40.73,27.13 v48.28,19.58 50.1,17.75 Q4.8 55.1,17.75 R39.1
  Bottom 0.889: v43.28,17.53 46.23,17.53 v48.28,19.58
ECU_I  (via drill 0.35)
  Top 0.229: IC1.23 v98.76,21.14 v98.75,21.13 | v59.28,14.73 59.28,13.1 59.3,13.12 59.3,9.86 59.52,9.63 IC5.2
  Bottom 0.229: v59.28,14.73 62.99,14.73 73,24.74 78.84,24.74 83.26,20.32 97.94,20.32 v98.75,21.13
ECU_OUT  (via drill 0.35)
  Top 0.229: R39.2 57.12,17.04 57.12,11.01 59.15,8.98 IC5.3
  Top 0.889: R45.1 71.84,7.32 72.39,7.87 v72.39,9.6
  Top 1.27: J5.10 J5.11 J5.12 | v81.95,18.35 59.93,18.35 R39.2
  Bottom 0.889: v72.39,9.6 80.67,9.6 89.39,18.32 90.37,18.32
  Bottom 1.27: v81.95,18.35 82.71,18.35 82.74,18.32 90.37,18.32 92.56,18.32 92.58,18.34 116.91,18.34 J5.12
ENGINE+
  Top 0.229: IC3.14 51.03,76.99 51.27,77.23 55.42,77.23 60.84,71.81 60.84,67.71
  Top 0.889: R19.1 53.14,69.64 49.72,69.64
  Top 1.27: R10.1 45.48,73.88 49.72,69.64 51.65,67.71 60.84,67.71 94.51,67.71 R4.1 94.66,72.85 100.55,72.85 Q8.2
ENGINE_F  (1 unrouted)
  Top 0.229: IC3.15 51.58,75.74 51.66,75.65 51.66,73.3 49.11,73.3 47.19,75.22 47.19,84.55
  Top 0.889: 39.87,87.53 39.47,87.12
  Top 2.54: ENG.2 ENG.1 36.3,90.29 39.47,87.12 42.67,83.92 R10.2
ENGINE_I  (via drill 0.35)
  Top 0.229: v87.27,39.06 87.43,39.06 96.22,30.27 IC1.4 | IC3.13 50.38,77.13 50.91,77.66 55.53,77.66 61.77,71.41 v61.77,69.8
  Bottom 0.229: v87.27,39.06 87.27,44.35 61.82,69.8 v61.77,69.8
ENGINE_OUT
  Top 1.27: J1.13 J1.14
ESTOP_IN
  Top 0.889: J2.6 116.91,58.58 112.06,53.72 R5.2
FAN1+  (via drill 0.35)
  Top 0.229: 53.73,81.82 IC3.3 53.63,82.57 54.3,83.23 55.67,83.23 56.3,82.59 v56.33,82.59 | v67.35,83.28 67.35,86.02 67.7,86.37 67.75,86.42
  Top 0.889: 67.75,86.42 Q1.2
  Top 1.27: 53.46,92.75 R21.1 53.36,92.71 60.46,92.71 R1.1 61.73,88.59 63.94,86.37 67.7,86.37
  Bottom 0.229: v67.35,83.28 57.01,83.28 v56.33,82.59
FAN1_I  (via drill 0.35)
  Top 0.229: v90.83,39.06 98.76,31.14 IC1.2 | IC3.2 54.28,80.8 v65.28,69.8
  Bottom 0.229: v90.83,39.06 90.83,44.75 65.79,69.8 v65.28,69.8
FAN1_OUT
  Top 0.889: J1.1 113.49,94.34 112.17,94.34 | R15.1 90.45,86.15 90.37,86.08
  Top 2.54: 76.93,85.77 Q1.3 79.78,86.08 U$4.C 90.37,86.08 103.91,86.08 112.17,94.34
FAN1SIG  (via drill 0.35)
  Top 0.889: 67.53,89.07 v67.54,89.06
  Top 1.27: 67.53,89.07 67.58,89.12 67.58,91.26 Q1.1 67.77,91.44 R1.2 | J2.1 127.02,67.72 118.28,67.72 v113.69,67.72
  Bottom 0.889: v113.69,67.72 113.69,67.74 93.56,87.87 68.73,87.87 v67.54,89.06
FAN2+
  Top 0.229: R22.1 51.03,85.05 IC3.7
  Top 0.889: 67.82,74.22 Q3.2
  Top 1.27: 53.58,87.25 R22.1 55.4,87.43 60.64,82.18 R2.1 60.64,77.18 63.6,74.22 67.82,74.22
FAN2_I  (via drill 0.35)
  Top 0.229: IC3.8 50.48,81.62 50.48,79.66 51.54,78.6 55.33,78.6 63.52,70.4 v63.52,69.47 | IC1.3 97.49,30.68 89.05,39.12 v89.04,39.12
  Bottom 0.229: v63.52,69.47 64.17,69.47 89.04,44.6 v89.04,39.12
FAN2_OUT
  Top 0.889: R17.1 81.01,72.02 77,76.03
  Top 2.54: 84.73,80.72 78.49,80.72 78.49,76.79 Q3.3 77,76.03 | 84.73,80.72 85.45,80.72 84.72,80 U$5.C | J1.8 109.5,82.71 86.72,82.71 84.73,80.72
FAN2SIG  (via drill 0.35)
  Top 0.889: v67.92,77.52 67.85,77.59 Q3.1 62.56,79.33 R2.2
  Top 1.27: J2.4 123.84,66.3 118.88,66.3 117.65,65.08 v109.63,65.08
  Bottom 1.27: v109.63,65.08 109.58,65.13 109.58,68.79 100.85,77.52 v67.92,77.52
FANS_F  (via drill 0.35)
  Top 0.229: 51.78,81.62 IC3.6 51.68,83.28 51.77,83.36 | IC3.4 52.98,83.22 52.83,83.36 51.77,83.36 | 51.77,83.36 53.03,84.63 v53.03,84.79 | R22.2 48.9,87.33 48.9,84.11 v48.87,84.07
  Top 2.54: R21.2 45.7,96.01 42.01,96.01 42.01,94.74 42.01,94.22 48.9,87.33
  Top 5.08: FANS.2 FANS.1 12.39,94.74 42.01,94.74
  Bottom 0.229: v48.87,84.07 52.53,84.07 53.03,84.58 v53.03,84.79
FUEL+  (via drill 0.35)
  Top 0.229: IC3.18 53.62,71.2 51.08,71.2 v51.05,71.22
  Top 1.27: Q12.2 57.87,55.26 v48.16,64.97 48.16,68.01 46.13,70.04 R9.1 | 70.81,64.97 71.17,65.33 R3.1 | R3.1
  Top 2.54: v48.16,64.97 70.81,64.97
  Bottom 0.229: v48.16,64.97 48.19,64.97 51.05,67.83 v51.05,71.22
FUEL_F  (via drill 0.35)  (1 unrouted)
  Top 0.229: 46.11,66.9 v46.28,66.9 46.26,66.89 | IC3.17 52.98,72.24 50.17,72.24 v50.14,72.2
  Top 0.889: R9.2 42.62,66.92
  Top 2.54: FUEL.2 FUEL.1 | 42.62,70.05 R9.2 42.62,74.52 36.49,80.66 FUEL.1 | FUEL.1 36.49,81.52
  Bottom 0.229: v50.14,72.2 46.28,68.34 v46.28,66.9
FUEL_I  (via drill 0.35)
  Top 0.229: IC1.5 94.95,30.07 85.9,39.12 v85.55,39.12 | IC3.19 54.28,76.68 54.44,76.84 55.26,76.84 60.06,72.05 60.06,69.56 v60.04,69.55
  Bottom 0.229: v85.55,39.12 85.55,43.62 60.04,69.12 v60.04,69.55
FUEL_OUT  (via drill 0.35)
  Top 1.27: v112.32,58.37 111.66,57.71 99.17,57.71 99.16,57.71 R37.1 86.41,57.71 Q2.3
  Top 2.54: 82.87,54.18 Q2.3 82.82,54.13 U$6.C
  Bottom 1.27: v112.32,58.37 117.62,63.67 117.62,73.86 J1.12
FUELSIG
  Top 1.27: 119.58,61.3 123.79,61.3 J2.5 | 78.02,60.25 77.81,60.05 Q2.1 75.44,60.05 75.44,63.33 R3.2
  Top 2.54: 119.58,61.3 97.95,61.3 94.03,65.23 78.44,65.23 78.02,64.81 78.02,60.25
GND  (8 unrouted)
  pour Top: 34.36,20.9 34.33,20.88 34.31,20.87 -15.18,20.87 -15.16,-6.02 164.39,-6.02 164.39,117.02 -15.16,117.02 -15.16,88.42 34.31,88.42 34.33,88.41 34.36,88.38 34.37,88.36 34.37,20.93
  pour Bottom: -14.15,21.77 33.45,21.77 33.45,87.25 -14.15,87.25
I_SENSE  (via drill 0.35)
  Top 0.889: IC1.1 100.03,29.83 v100.99,30.79
  Bottom 0.889: v100.99,30.79 100.99,26.16 102.26,24.89 105,24.89 106.44,26.33
INJIGN_OUT
  Top 1.27: J1.11 J1.10 | Q8.3 110.54,74.61
  Top 2.54: J1.10 119.43,82.2 111.84,74.61 110.54,74.61
MICS_OUT  (via drill 0.35)
  Top 0.229: IC5.14 68.17,6.38 68.17,3.68 v75.03,3.68
  Top 0.889: R41.1 9.16,9.18 6.15,9.18 v6.15,9.91
  Top 1.27: J5.3 J5.4 J5.5 J5.6 J5.7 | v75.03,3.68 75.05,3.7 R49.1
  Bottom 0.889: 119.39,5.61 119.78,6.01 J5.7
  Bottom 2.54: 119.39,5.61 117.46,3.68 v75.03,3.68 6.15,3.68 v6.15,9.91
MISC+  (via drill 0.35)
  Top 0.229: v64.31,12.55 64.31,6.98 66.7,6.98 IC5.15
  Top 0.635: Q6.5 54.46,3.35 51.82,3.35 47.24,3.35 U4.4
  Top 0.889: Q6.6 Q6.5 | JMISC.2 6.3,6.13 9.31,6.13 R41.2 12.19,6.18 v12.19,6.25 | 51.82,3.35 51.71,3.35 v51.71,11.02
  Bottom 0.635: v12.19,6.25 12.19,11.02 v51.71,11.02 51.77,10.97 62.74,10.97 v64.31,12.55
MISC_I
  Top 0.229: IC5.13 63.3,5.73 63.3,17.09 94.94,17.09 IC1.20
N$1  (1 unrouted)
  Top 0.229: 39.04,20.96 U1.3 40.19,20.89 40.62,21.32 40.62,22.37 41.05,22.79 U1.6 42.69,22.79 46.62,18.87 Q4.1
  Top 0.635: 39.08,20.86 U1.3 36.56,20.89 | C1.2
  Top 0.889: U1.3 39.1,18.57 C2.1
  Top 1.27: ECU.2 ECU.1 | ECU.1 | ECU.1 36.47,32.47 JECU.2 C1.2
N$2  (1 unrouted)
N$3
  Top 1.27: Q2.2 71.38,54.97 Q12.3
N$4
  Top 0.635: R13.2 117.89,23.95 LED16.A
N$5
  Top 0.635: R5.1 97.18,49.42 Q5.3
  Top 1.27: R6.1 R5.1
N$6
  Top 0.635: C1.1 39.1,23.88 U1.1
N$7  (via drill 0.35)
  Top 0.229: Q5.5 Q5.2 Q5.1
  Top 0.635: Q5.6 Q5.5 93.11,48.37 v93.07,48.41
  Top 1.27: Q12.1 59.34,60.29 59.34,58.36 59.33,58.35 v59.33,58.06 | 101.09,78.07 100.68,78.07 Q8.1 94.51,77.97 R4.2 94.61,75.01 99.13,75.1 v99.06,75.03
  Bottom 1.27: v59.33,58.06 58.67,58.72 58.67,70.56 63.14,75.03 v99.06,75.03 99.06,56.39 93.07,50.39 v93.07,48.41
N$8
  Top 0.635: U2.1 36.26,16.01 C5.1
N$9  (3 unrouted)
N$10
  pour Bottom: 34.61,20.89 34.59,20.87 34.56,20.85 -14.4,20.85 -14.4,-6.02 162.74,-6.02 162.74,117.02 -14.15,117.02 -14.15,88.42 34.56,88.42 34.59,88.41 34.61,88.38 34.62,88.36 34.62,20.91
N$11  (2 unrouted)
N$12
  Top 0.229: U1.5 42.83,21.84 45.36,19.3 45.36,16.76 45.65,16.48 Q4.2
N$13  (2 unrouted)
N$14
  Top 0.635: U5.1 44.78,40.3 C10.1
N$15
  Top 0.229: U2.5 42.06,15.04 42.11,15.09 43.38,15.09 44.53,13.94 Q4.4
N$16
  Top 0.635: U3.1 44.31,10.53 41.3,10.53 C3.1
N$19
  Top 0.635: U4.1 41.21,5.28 C4.1
N$20
  Top 0.229: U5.5 49.31,39.35 49.31,33.79 Q7.2
N$21
  Top 0.635: LED1.A 93.12,11.16 93.12,9.6 R12.2
N$28
  Top 0.229: U3.5 48.01,9.55 48.62,8.94 48.62,7.62 48.96,7.28 Q6.2
N$30
  Top 0.229: Q6.4 50.06,4.68 49.86,4.48 47.37,4.48 U4.5
N$32
  Top 0.635: 86.12,7.8 R11.2 85.57,8.36 LED7.A
N$89
  Top 0.889: S2.4 116.32,53.27 117.53,52.06 124.86,52.06 R14.1
S_0  (via drill 0.35)
  Top 0.635: IC2.10 66.36,22.57 v66.34,22.55 | IC1.10 88.6,30.73 v82.97,30.73
  Bottom 0.635: v66.34,22.55 74.52,30.73 v82.97,30.73 82.96,30.72 82.96,35.31 99.16,35.31 99.16,48.03 112.36,48.03 113.67,46.72 114.05,46.72 U$1.7-RX2/OUT1A
S_1  (via drill 0.35)
  Top 0.635: IC2.11 69.93,21.29 v67.06,21.29 | IC1.11 87.31,28.21 87.31,26.77 v84.19,26.77
  Bottom 0.635: v67.06,21.29 72.54,26.77 v84.19,26.77 84.19,34.52 99.95,34.52 99.95,47.24 111,47.24 U$1.8-TX2/IN1
S_2  (via drill 0.35)
  Top 0.635: IC2.14 79.41,21.29 82.65,21.29 82.65,23.77 86.26,23.77 v86.67,23.37 87.33,23.37 IC1.14
  Bottom 0.635: U$1.10-CS/MQSR 107.49,45.66 101.65,45.66 101.65,32.94 86.67,32.94 v86.67,23.37
S_3  (via drill 0.35)
  Top 0.508: 79.36,19.99 IC2.13
  Top 0.635: IC1.13 86.06,21.84 v84.28,21.84 84.28,19.99 79.36,19.99
  Bottom 0.635: U$1.9-OUT1C 109.24,46.45 100.84,46.45 100.84,33.73 85.45,33.73 85.45,21.84 v84.28,21.84
SHIFTER_F  (5 unrouted)
  Top 0.229: 52.08,44.53 IC4.4 52.07,44.49
  Top 1.27: 36.56,52.29 SHIFT.1 | 42.68,45.53 R27.1 42.68,46.14 SHIFT.1 | SHIFT.2 SHIFT.1
SHIFTER_F1  (1 unrouted)
  Top 0.229: U2.3 39.5,14.11 39.96,14.57 39.96,15.53 40.44,16.01 U2.6 43.99,16.01 44.76,15.24 46.59,15.24 Q4.3
  Top 0.635: U2.3 39.05,14.06 35.47,14.06
  Top 0.889: 34,16.61 33.95,16.56 | C6.1 34.03,18.58 C5.2 | JDASH.1 29.12,7.76 29.12,14.76
  Top 1.27: 34,16.61 34,16.37 C5.2 32.1,16.34 30.53,14.76 29.12,14.76 DASH.2 DASH.1
SHIFTER_F2  (1 unrouted)
  Top 0.229: U3.3 45.25,8.6 45.93,9.28 45.93,10.04 46.39,10.5 U3.6 48.18,10.5 50.06,8.61 Q6.1
  Top 0.635: U3.3 44.31,8.53 41.2,8.53 C3.2 41.09,8.41 | C8.1 37.8,8.53 | 36.24,10.91 32.08,10.91 32.08,4.83 20.99,4.83 20.99,7.47 | 37.76,8.55 C8.1 | 37.81,8.42 37.81,8.53 C8.1
  Top 0.889: 20.99,7.47 JTELE.2
  Top 1.27: 19.32,14.67 TELE.2 | TELE.2 19.16,14.78 20.99,12.95 20.99,7.47 | C3.2 37.81,8.42 | TELE.2 TELE.1
SHIFTER_F3  (1 unrouted)
  Top 0.152: C4.2 40.99,3.15
  Top 0.229: C4.2 41,3.16 | 44.27,3.36 U4.3 45.27,3.38 45.77,3.88 45.77,4.75 46.3,5.28 U4.6 48.99,5.28 49.76,6.04 50.03,6.04 Q6.3
  Top 0.635: U4.3 44.18,3.27 41.45,3.27 41.28,3.44 C4.2 41.15,2.96 | 38.15,5.22 C7.1 37.83,2.94
  Top 0.889: 41.02,3.44 C4.2 41.15,3.22 | JMISC.1 3.76,7.48
  Top 1.27: MISC.2 MISC.1 | MISC.1 5.67,14.72 | MISC.1 6.92,14.81 | 5.68,14.81 MISC.1 | MISC.1 3.76,14.81 3.76,7.48 3.76,2.91 | C4.2 40.06,3.31 38.15,5.22
SHIFTER_F4  (5 unrouted)
  Top 0.229: U5.6 48.81,40.3 48.71,40.2 48.71,38.4
  Top 0.508: 47.19,35.06 Q7.1 47.15,35.06
  Top 0.635: 47.59,37.18 47.59,35.11 Q7.1
  Top 0.889: 42.44,34.23 JABS.2 C9.1 | C10.2 42.44,39.86
  Top 1.27: ABSON.2 ABSON.1 36.56,41.86 38.52,39.9 C10.2 | ABSON.2
SHIFTER_I
  Top 0.229: IC4.2 50.75,46.43 57.25,46.43 57.25,39.01 59.53,36.74 85.36,36.74 91.14,30.95 IC1.8
SHIFTER_OUT  (via drill 0.35)
  Top 0.229: 45.48,44.59 R27.2
  Top 0.381: IC4.3 51.4,43.73 arc-90 50.6,42.93 48.05,42.93 arc-90 45.51,45.47 45.51,45.48
  Top 0.889: v55.42,24.99 54.81,24.99 54.5,24.68 R33.1
  Top 1.27: v47.9,45.47 47.89,45.48 45.51,45.48 R27.2
  Bottom 1.27: v47.9,45.47 49.84,45.47 53.8,41.51 53.8,25.35 54.15,24.99 v55.42,24.99 66.04,24.99 77.57,36.52 95.5,36.52 95.5,49.94 104.8,59.23 109.78,59.23 116.15,65.61 116.15,85.12 J1.9
TELE+  (via drill 0.35)
  Top 0.229: v65.43,11.53 65.43,8.33 IC5.17
  Top 0.635: U3.4 47.24,6.91 33.53,6.91 | 33.53,6.91 33.53,3.72 14.95,3.72 R42.2 | 33.53,6.91 v33.53,9.4
  Top 0.889: v53.34,9.4 53.34,8.55 Q6.8 Q6.7 | JTELE.1 15.19,5.95 R42.2
  Bottom 0.635: v33.53,9.4 v53.34,9.4 53.38,9.36 63.26,9.36 v65.43,11.53
TELE_I
  Top 0.229: IC1.21 96.27,18.74 96.27,16.36 68.89,16.36 68.89,9.63 IC5.19
TELE_OUT  (via drill 0.35)
  Top 0.229: IC5.18 68.89,8.98 68.89,5.74 v72.75,5.74
  Top 0.889: v18.03,9.91 18.03,9.35 15.31,9.35 R42.1 | R47.1 72.75,5.71 v72.75,5.74
  Bottom 1.27: J5.14 117.66,10.67 112.89,15.44 95.33,15.44 85.63,5.74 v72.75,5.74 19.96,5.74 18.03,7.67 v18.03,9.91
USB+  (via drill 0.35)
  Top 0.889: v137.87,66.04 137.87,66.02 130.42,58.58 J2.3
  Bottom 0.889: v137.87,66.04 139.39,64.52 139.39,40.11 136.75,37.46 U$1.D+
USB-  (via drill 0.35)
  Top 0.889: v137.87,69.34 130.6,62.08 J2.2
  Bottom 0.889: U$1.D- 137.11,35.66 140.44,38.98 140.44,66.78 v137.87,69.34
V_ABSMOTOR
  Top 0.229: IC2.5 61.12,28.92 R62.1
  Top 1.27: R62.1 58.27,32.08 R61.2
V_ABSON
  Top 0.229: IC2.9 62.84,23.84 R32.1
  Top 1.27: R32.1 60.05,20.32 R31.2
V_ABSVALVE
  Top 0.229: IC2.4 64.51,30.19 R60.1
  Top 1.27: R60.1 64.51,34.53 R59.2
V_DASH  (via drill 0.35)
  Top 0.229: v77.27,19.76 77.27,28.92 IC2.20
  Top 0.889: v79.2,11.18 80.17,12.14 R44.1
  Top 1.27: R44.1 R43.2
  Bottom 0.889: v77.27,19.76 77.47,19.76 82.63,14.61 v79.2,11.18
V_ECU  (via drill 0.35)
  Top 0.229: v72.03,20.07 72.03,32.73 IC2.23
  Top 0.889: v72.39,13.21 72.34,13.16 72.34,12.9 71.52,12.09 R46.1
  Top 1.27: R46.1 R45.2
  Bottom 0.889: v72.39,13.21 72.03,13.21 v72.03,20.07
V_ENGINE  (via drill 0.35)
  Top 0.229: IC2.3 69.93,31.45 v66.04,31.45
  Top 0.889: R19.2 57.04,69.63 | v57.05,69.6 57.05,69.58 v57.04,69.59 57.04,69.63 | R20.1 57.04,69.63
  Bottom 0.229: v66.04,31.45 66.04,46.78 55.02,57.8 55.02,67.56 v57.05,69.6
V_FAN1  (via drill 0.35)
  Top 0.229: IC2.7 69.84,26.48 62.75,26.48 v62.74,26.47
  Top 1.27: R15.2 92.31,89.05 R16.1 92.31,93.46 v91.03,94.74
  Bottom 0.229: v62.74,26.47 63.2,26.47 64.71,27.98 64.71,46.24 54.2,56.75 54.2,82.5 66.45,94.74 v91.03,94.74
V_FAN2  (via drill 0.35)
  Top 0.229: IC2.6 65.44,27.65 v65.4,27.61
  Top 0.889: R18.1 86.11,72.06 86.06,72.11 R17.2 86.06,70.41 v86,70.36
  Bottom 0.229: v86,70.36 86,51.05 92.76,44.3 92.76,38.56 92.51,38.3 71.98,38.3 66.9,33.22 66.9,27.79 66.73,27.61 v65.4,27.61
V_FUEL  (via drill 0.35)
  Top 0.229: IC2.2 69.89,32.68 67.56,32.68 v67.55,32.66
  Top 0.889: R37.2 94.6,55.66 94.6,52.05 94.52,51.97 R38.1
  Top 1.27: R37.2 93.2,55.81 v92.39,55
  Bottom 0.229: v92.39,55 92.39,51.85 91.59,51.05 91.59,46.84 93.83,44.6 93.83,38.1 93.27,37.54 72.71,37.54 67.83,32.66 v67.55,32.66
V_MISC  (via drill 0.35)
  Top 0.229: v75.44,20.02 75.45,20.03 75.45,30.19 IC2.21
  Top 0.889: R50.1 78.02,12.18 79.35,13.51 v79.35,13.56
  Top 1.27: R50.1 77.01,5.63 R49.2
  Bottom 0.889: v75.44,20.02 75.44,17.17 77.62,14.99 77.62,12.19 77.98,12.19 v79.35,13.56
V_SENSE  (via drill 0.35)
  Top 0.889: IC2.1 71.34,35.4 82.56,35.4 86.31,31.65 v87.94,31.65
  Bottom 0.889: v87.94,31.65 95.76,23.83 105.56,23.83 108.98,27.24
V_SHIFTER
  Top 0.229: IC2.8 59.17,25.11 R34.1
  Top 1.27: R34.1 59.12,22.95 56.44,22.95 R33.2
V_TELE  (via drill 0.35)
  Top 0.229: v73.71,19.71 73.71,31.46 IC2.22
  Top 0.813: R47.2 74.52,7.63 R48.1
  Top 0.889: R48.1 73.36,12.14 v72.39,11.18
  Bottom 0.889: v73.71,19.71 73.71,16.66 75.84,14.53 75.84,11.18 v72.39,11.18
(copper drawn outside any net)
  shapes: Top area x6

## Text on the board
tNames: F23 v2 Corey Braun | Smart PDM Board